# Altium PCB SparkIO Thermal Shield.PcbDoc
Units mil, origin at the board's own origin, x right, y up, seen from the top; angles counter-clockwise.
Board outline 2299.45 x 3399.77 mil, 2 copper layers ([1] Top Layer, [2] Bottom Layer), stack 61.2 mil thick; 47 components, 38 nets, 157 pads, 15 vias.
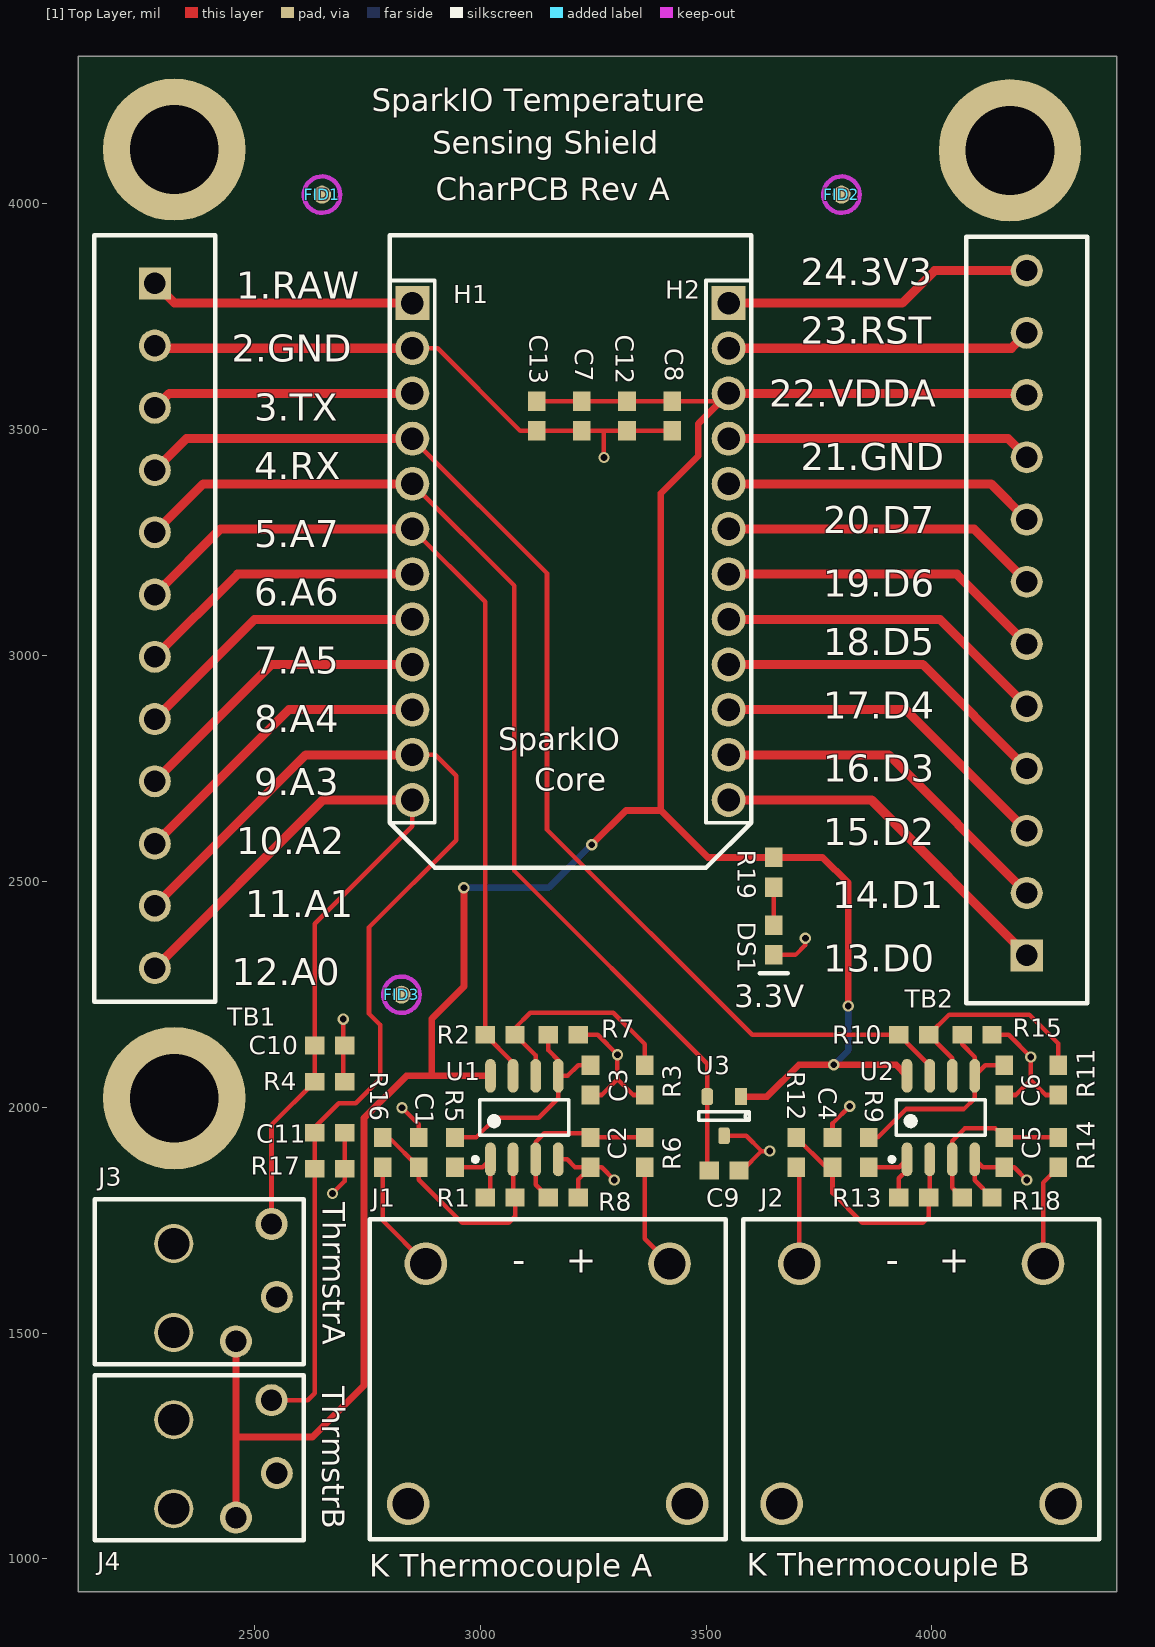
[diagram p0: [1] Top Layer view]
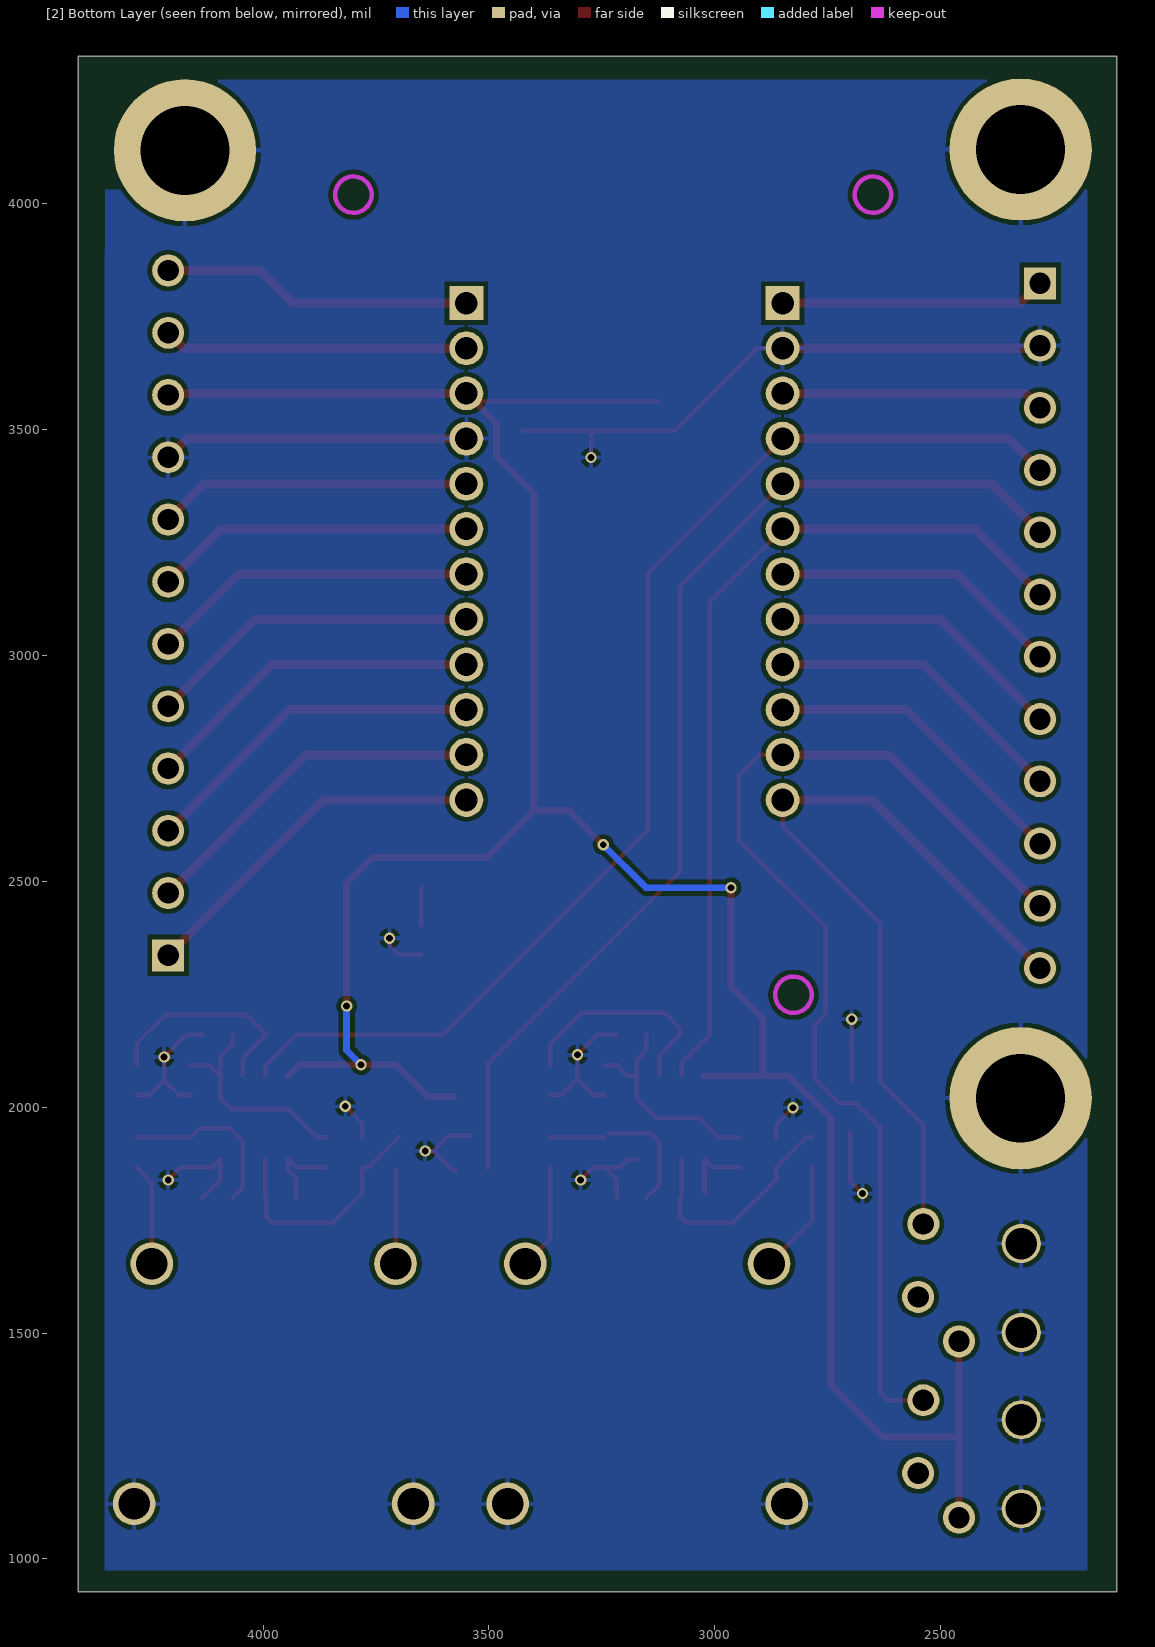
[diagram p1: [2] Bottom Layer view, seen from below]
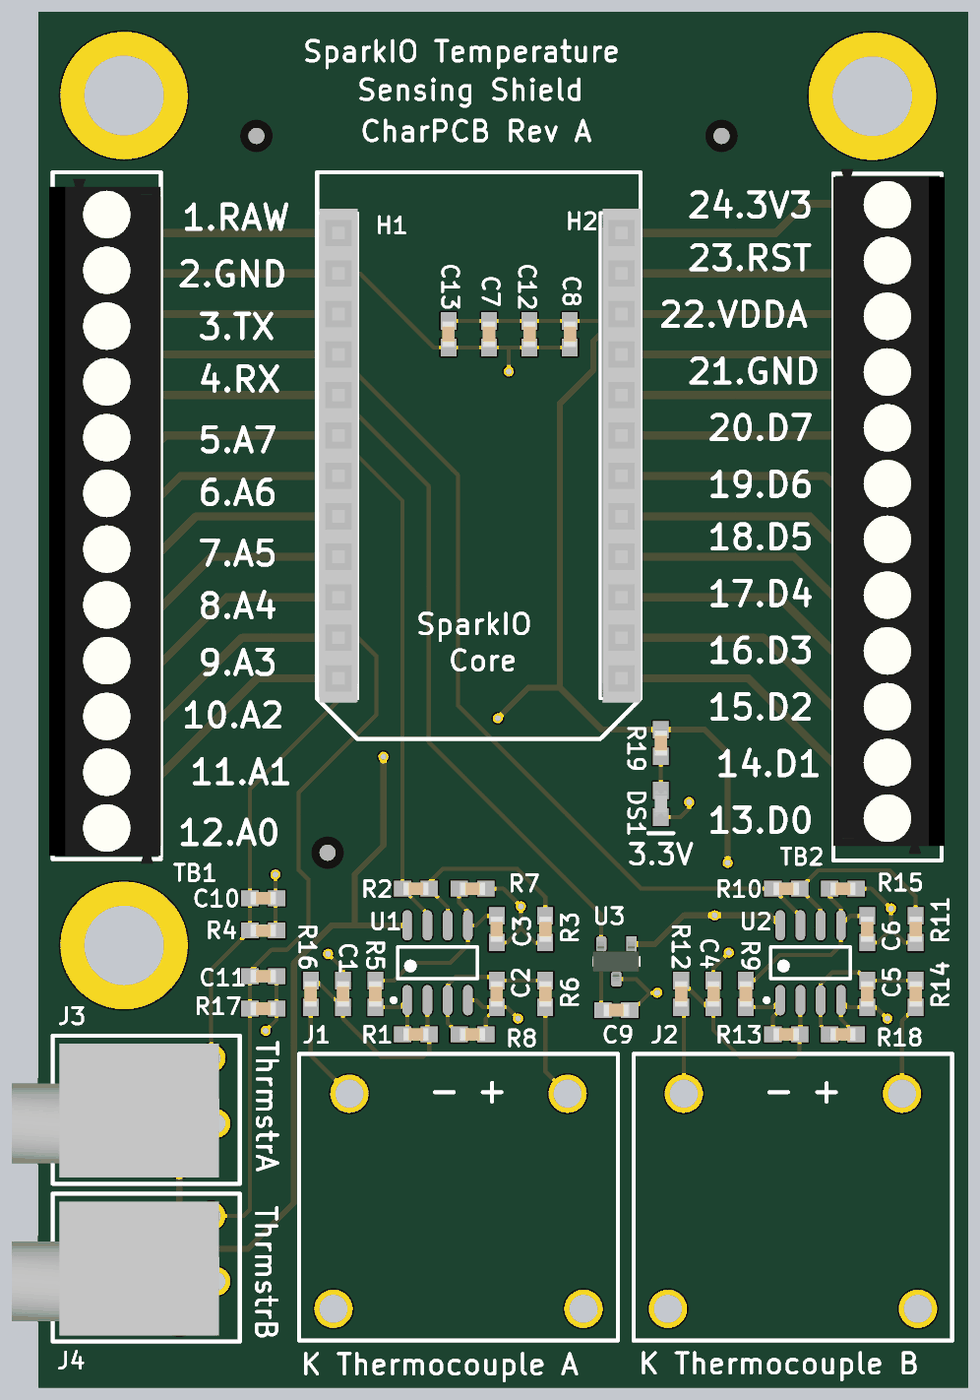
[diagram p2: 3D render of the assembled board from above, using the file's embedded part models]

## Layer stack, top to bottom
[1] Top Layer: signal copper 1.4
Dielectric: core 58.4, FR-4, Dk 4.8
[2] Bottom Layer: signal copper 1.4

## Board outline
2110,927 4409.45,927 4409.45,4326.77 2110,4326.77

## Design rules (kind name [scope] priority, off if disabled: settings)
Clearance [All] p1: gap=10
HoleSize [All] p1: absolutevalues=TRUE maxlimit=200 minlimit=1 maxpercent=80.000 minpercent=20.000
PlaneClearance PolyClearance [IsPoly] p1: clearance=50
PlaneClearance [All] p2: clearance=20
PolygonConnect [All] p1: connectstyle=Relief reliefconductorwidth=10 reliefentries=4 polygonreliefangle="90 Angle" airgapwidth=10
RoutingVias [All] p1: holewidth=28 width=50 viastyle="Through Hole" minholewidth=28 minwidth=50 maxholewidth=28 maxwidth=50
SolderMaskExpansion [All] p1: expansion=4
Width [All] p1: maxlimit=50 minlimit=10 preferedwidth=10
26 further rules are at their usual default settings.

## Components (designator, comment, footprint, x,y, rotation, side; value= is the part's Value field where it differs from the comment)
C1 "Capacitor" "0603 - NO SILK" 2864.25,1900 r270 top
C2 "Capacitor" "0603 - NO SILK" 3244.25,1900 r270 top
C3 "Capacitor" "0603 - NO SILK" 3244.25,2060 r270 top
C4 "Capacitor" "0603 - NO SILK" 3780,1900 r270 top
C5 "Capacitor" "0603 - NO SILK" 4160,1900 r270 top
C6 "Capacitor" "0603 - NO SILK" 4160,2060 r270 top
C7 "Capacitor" "0603 - NO SILK" 3225,3530 r270 top
C8 "Capacitor" "0603 - NO SILK" 3425,3530 r270 top
C9 "Capacitor" "0603 - NO SILK" 3540,1860 r0 top
C10 "Capacitor" "0603 - NO SILK" 2666.93,2136.67 r0 top
C11 "Capacitor" "0603 - NO SILK" 2666.93,1943.78 r0 top
C12 "Capacitor" "0603 - NO SILK" 3325,3530 r270 top
C13 "Capacitor" "0603 - NO SILK" 3125,3530 r270 top
DS1 "PowerInd" "LED0603 - Single" 3650,2370 r270 top
FID1 "Fiducial" Fiducial_40mil 2650,4020 r90 top
FID2 "Fiducial" Fiducial_40mil 3800,4020 r90 top
FID3 "Fiducial" Fiducial_40mil 2826,2249 r90 top
H1 "SparkIO Header 1" HDR1X12 2850,3780 r270 top
H2 "SparkIO Header 2" HDR1X12 3550,3780 r270 top
J1 "Thermocouple A" "PCC-SMP K Thermocouple" 3149.61,1653.54 r0 top
J2 "Thermocouple B" "PCC-SMP K Thermocouple" 3976.38,1653.54 r0 top
J3 "Thermistor A" "Audio Jack 2.5mm Mono" 2550,1580 r270 top
J4 "Thermistor B" "Audio Jack 2.5mm Mono" 2550,1190 r270 top
R1 "Resistor" "0603 - NO SILK" 3044.25,1800 r0 top
R2 "Resistor" "0603 - NO SILK" 3044.25,2160 r0 top
R3 "Resistor" "0603 - NO SILK" 3364.25,2060 r90 top
R4 "Resistor" "0603 - NO SILK" 2666.93,2056.67 r0 top
R5 "Resistor" "0603 - NO SILK" 2944.25,1900 r270 top
R6 "Resistor" "0603 - NO SILK" 3364.25,1900 r270 top
R7 "Resistor" "0603 - NO SILK" 3184.25,2160 r180 top
R8 "Resistor" "0603 - NO SILK" 3184.25,1800 r180 top
R9 "Resistor" "0603 - NO SILK" 3860,1900 r270 top
R10 "Resistor" "0603 - NO SILK" 3960,2160 r0 top
R11 "Resistor" "0603 - NO SILK" 4280,2060 r90 top
R12 "Resistor" "0603 - NO SILK" 3700,1900 r270 top
R13 "Resistor" "0603 - NO SILK" 3960,1800 r0 top
R14 "Resistor" "0603 - NO SILK" 4280,1900 r270 top
R15 "Resistor" "0603 - NO SILK" 4100,2160 r180 top
R16 "Resistor" "0603 - NO SILK" 2784.25,1900 r270 top
R17 "Resistor" "0603 - NO SILK" 2666.93,1863.78 r0 top
R18 "Resistor" "0603 - NO SILK" 4100,1800 r180 top
R19 "Resistor" "0603 - NO SILK" 3650,2520 r270 top
TB1 "SparkIO Terminal Block 1" "Terminal Block 3.5mm x 12" 2280,3930 r270 top
TB2 "SparkIO Terminal Block 2" "Terminal Block 3.5mm x 12" 4210,2230 r90 top
U1 "OPAMP dual" SOIC8 3097.79,1977.01 r90 top
U2 "OPAMP dual" SOIC8 4020,1977.01 r90 top
U3 "Header 3" SOT23-3L 3540,1980 r270 top

## Footprints (in the part's own frame and the unit in brackets; to place one, negate y for a bottom-side part, rotate by r counter-clockwise, add the part's x,y. Pads: shape width x height; smd on the part's side, far side on the other; paste and mask are expansions set on the pad)
"0603 - NO SILK" [mil] "Chip Resistor, 2-Leads, Body 1.6x0.8mm, IPC Medium Density"
  rect 43x39 smd: 1(-33,0) 2(33,0)
  body extent -31,-16 32,16, height 31
"Audio Jack 2.5mm Mono" [mm]
  round 2.2 hole 1.77: 0(-3,-5.8) 0(2,-5.8)
  round 1.8 hole 1.2: 1(2.5,-2.3) 2(0,0) 3(-4.1,-0.3)
  silkscreen extent -5.5,-10.25 3.78,1.5, body extent -5,-12.82 3.4,0.23, height 5
Fiducial_40mil [mil] "Fiducial 40mil"
  round 40 smd mask+20: 0(0,0)
  Keep-Out Layer circle w10: c0,0 r40.31
HDR1X12 [mil] "Connector; Header; 12 Position"
  rect 75x75 hole 50: 1(0,0)
  round 75 hole 50: 2(100,0) 3(200,0) 4(300,0) 5(400,0) 6(500,0) 7(600,0) 8(700,0) 9(800,0) 10(900,0) 11(1000,0) 12(1100,0)
  silkscreen extent -50,-50 1150,50, body extent -60,-45 1160,51, height 335
"LED0603 - Single" [mil] "Chip LED, 2-Leads, Body 1.6x0.8mm, IPC Medium Density"
  rect 43x39 smd: 1(-33,0) 2(33,0)
  body extent -32,-16 32,16, height 29
"PCC-SMP K Thermocouple" [mm] "K type thermocouple horizontal through hole connector"
  round 2.4 hole 1.77: 0(-7.85,-13.5) 0(7.85,-13.5) 1(-6.85,0) 2(6.85,0)
  silkscreen extent -10,-15.49 10,2.5, body extent -9.65,-15.24 9.65,2.03, height 6.3
SOIC8 [mm] "SOIC, 8-Leads, Body 4.9x3.9mm, Pitch 1.27mm, IPC High Density"
  oval 1.9x0.6 smd: 1(-2.35,1.905) 2(-2.35,0.635) 3(-2.35,-0.635) 4(-2.35,-1.905) 5(2.35,-1.905) 6(2.35,-0.635) 7(2.35,0.635) 8(2.35,1.905)
  silkscreen extent -2.47,-2.5 1,2.88, body extent -2,-2.5 2,2.5, height 1.75
SOT23-3L [mm]
  rect 0.95x0.65 smd: 1(-1.1,0.95)
  rrect50% 0.95x0.65 smd: 2(-1.1,-0.95) 3(1.1,0)
  silkscreen extent -0.25,-1.43 0.24,1.43, body extent -1.25,-1.49 1.23,1.43, height 1.01
"Terminal Block 3.5mm x 12" [mm]
  rect 1.8x1.8 hole 1.2: 1(2.7,0)
  round 1.8 hole 1.2: 2(6.2,0) 3(9.7,0) 4(13.2,0) 5(16.7,0) 6(20.2,0) 7(23.7,0) 8(27.2,0) 9(30.7,0) 10(34.2,0) 11(37.7,0) 12(41.2,0)
  silkscreen extent 0,-3.4 43.1,3.4, body extent 0.4,-3.6 43.39,3.4, height 8.4

## Part data
DS1: library part "LED Small", "LED small symbol"
FID1 FID2 FID3: library part Fiducial_1
H1 H2 TB1 TB2: library part "Header 12", "Header, 12-Pin"
J1 J2: library part "Header 2", "Header .1\" 2 Pos"
J3 J4: library part "Header 3", "Header .1\" 3 Pos"
U1 U2: "Dual Operational Amplifier"
U3: "Header .1\" 3 Pos"

## Free pads (board coordinates)
  round 314.96 hole 196.85: 0(2322.83,2019.84) 0(2322.83,4119.84) 0(4172.83,4118.11)

## Via types
v1: diameter 25, hole 15, [1] Top Layer to [2] Bottom Layer, 15 vias

## Nets (pads, with @x,y where several pads share a name; then routed paths per layer and width w, separated by ;. In a path a pad name is that pad's centre, name@x,y a point inside that pad or via, vN(x,y) a via of type N, cw(c..) or ccw(c..) an arc to the next point about the centre after c; other vN are vias at no path point)
GND: C1.1 C2.2 C3.2 C4.1 C5.2 C6.2 C7.2 C8.2 C9.2 C10.2 C11.2 C12.2 C13.2 DS1.2 H1.2 H2.4 J1.0 J2.0 J3.0 J4.0 pad.0 R3.1 R4.2 R7.1 R8.1 R11.1 R15.1 R17.2 R18.1 TB1.2 TB2.9 U1.4 U2.4 U3.3 | length 3774.7
  [1] Top Layer w10: v1(2673,1809) 2699.93,1835.93 R17.2 C11.2 ; R4.2@2697,2059.6 v1(2697,2195) ; v1(2827,1999) 2864.25,1961.75 C1.1 ; H1.2 2906,3680 3089,3497 C13.2 C7.2 C12.2 C8.2 ; U1.4 3192.51,1884.49 3210,1867 C2.2 ; R8.1 3217.25,1840 C2.2 ; R7.1 3260,2160 v1(3304,2116) 3304,2062 ; C3.2 3269,2027 3304,2062 ; v1(3274,3438) 3274,3496 ; v1(3297,1839) 3269,1867 C2.2 ; R3.1 3339,2027 3304,2062 ; H2.4@3533,3497 H2.4 ; U3.3 3589.31,1936.69 3623,1903 ; C9.2 3580,1860 3623,1903 ; v1(3641,1903) 3623,1903 ; DS1.2 3698,2337 3720,2359 v1(3720,2374) ; C4.1 3780,1964 v1(3818,2002) ; R18.1 4095,1838 U2.4 4112.49,1867 C5.2 4182,1867 v1(4210,1839) ; R15.1 4170,2160 v1(4219,2111) 4219,2060 ; C6.2 4186,2027 4219,2060 ; R11.1 4252,2027 4219,2060
  [1] Top Layer w20: TB1.2 2285.91,3680 H1.2 ; H2.4 4168.66,3480 TB2.9
NetDS1_1: DS1.1 R19.2 | length 84
  [1] Top Layer w10: DS1.1 R19.2
SC_1_RAW: H1.1 TB1.1 | length 588.1
  [1] Top Layer w20: TB1.1 2323.7,3780 H1.1
SC_3_TX: H1.3 TB1.3 | length 583.2
  [1] Top Layer w20: TB1.3 2311.89,3580 H1.3
SC_4_RX: H1.4 R10.1 TB1.4 U2.7 | length 2674
  [1] Top Layer w10: H1.4 3148,3182 3148,2614 3602,2160 R10.1 3995,2092 U2.7
  [1] Top Layer w20: TB1.4 2349.68,3480 H1.4
SC_5_A7: C9.1 H1.5 TB1.5 U3.2 | length 2400.4
  [1] Top Layer w10: H1.5 3076,3154 3076,2523 3502.6,2096.4 U3.2 C9.1@3502.6,1864.4
  [1] Top Layer w20: TB1.5 2387.48,3380 H1.5
SC_6_A6: H1.6 R2.1 TB1.6 U1.7 | length 1932.9
  [1] Top Layer w10: H1.6 3011.25,3118.75 R2.1 3072.79,2098.46 U1.7
  [1] Top Layer w20: TB1.6 2425.28,3280 H1.6
SC_7_A5: H1.7 TB1.7 | length 645.8
  [1] Top Layer w20: TB1.7 2463.07,3180 H1.7
SC_8_A4: H1.8 TB1.8 | length 661.5
  [1] Top Layer w20: TB1.8 2500.87,3080 H1.8
SC_9_A3: H1.9 TB1.9 | length 677.1
  [1] Top Layer w20: TB1.9 2538.66,2980 H1.9
SC_10_A2: H1.10 TB1.10 | length 692.8
  [1] Top Layer w20: TB1.10 2576.46,2880 H1.10
SC_11_A1: C11.1 H1.11 J4.3 R17.1 TB1.11 | length 2466.4
  [1] Top Layer w10: J4.3 2618.42,1351.42 2633.93,1366.93 R17.1 C11.1 2633.93,1955.93 2687,2009 2725,2009 2779,2063 2779,2182 2754,2207 2754,2398 2947,2591 2947,2734 2901,2780 H1.11
  [1] Top Layer w20: TB1.11 2614.25,2780 H1.11
SC_12_A0: C10.1 H1.12 J3.3 R4.1 TB1.12 | length 1791.8
  [1] Top Layer w10: J3.3 2538.19,1960.93 R4.1 C10.1 2633.93,2405.93 2850,2622 H1.12
  [1] Top Layer w20: TB1.12 2652.05,2680 H1.12
SC_13_D0/SDA1: H2.12 TB2.1 | length 802.4
  [1] Top Layer w20: H2.12 3866.3,2680 TB2.1
SC_14_D1/SCL1: H2.11 TB2.2 | length 786.7
  [1] Top Layer w20: H2.11 3904.09,2780 TB2.2
SC_15_D2: H2.10 TB2.3 | length 771.1
  [1] Top Layer w20: H2.10 3941.89,2880 TB2.3
SC_16_D3: H2.9 TB2.4 | length 755.4
  [1] Top Layer w20: H2.9 3979.68,2980 TB2.4
SC_17_D4: H2.8 TB2.5 | length 739.7
  [1] Top Layer w20: H2.8 4017.48,3080 TB2.5
SC_18_D5: H2.7 TB2.6 | length 724.1
  [1] Top Layer w20: H2.7 4055.28,3180 TB2.6
SC_19_D6: H2.6 TB2.7 | length 708.4
  [1] Top Layer w20: H2.6 4093.07,3280 TB2.7
SC_20_D7: H2.5 TB2.8 | length 692.8
  [1] Top Layer w20: H2.5 4130.87,3380 TB2.8
SC_22_VDDA: C7.1 C8.1 C12.1 C13.1 H2.3 J3.1 J4.1 R19.1 TB2.10 U1.8 U2.8 U3.1 | length 5963
  [1] Top Layer w10: C13.1 C7.1 C12.1 C8.1 3533,3563 H2.3
  [1] Top Layer w15: J4.1 J3.1 ; 2459.45,1270 2629,1270 2743,1384 2743,1976 2836.53,2069.53 2893,2069.53 ; v1(2964,2486) 2964,2267 2893,2196 2893,2069.53 ; U1.8 2893,2069.53 ; v1(3247,2581) 3323,2657 3400,2657 ; H2.3 3483,3513 3483,3442 3400,3359 3400,2657 ; U3.1 3635.31,2023.31 3706,2094 v1(3783,2094) 3920.53,2094 U2.8 ; v1(3815,2224) 3815,2496 3758,2553 R19.1 3504,2553 3400,2657
  [1] Top Layer w20: H2.3 TB2.10@4206.46,3580
  [2] Bottom Layer w15: v1(2964,2486) 3152,2486 v1(3247,2581) ; v1(3783,2094) 3815,2126 v1(3815,2224) v1@3814,2223
SC_23_RST: H2.2 TB2.11 | length 674.2
  [1] Top Layer w20: H2.2 4175.75,3680 TB2.11
SC_24_VCC: H2.1 TB2.12 | length 689.8
  [1] Top Layer w20: H2.1 3934,3780 4006.05,3852.05 TB2.12
TC_A_IN_+: J1.2 R6.2 | length 236.3
  [1] Top Layer w10: R6.2 3364.25,1708.59 J1.2
TC_A_IN_-: J1.1 R16.2 | length 253.1
  [1] Top Layer w10: R16.2 2784.25,1749.21 J1.1
TC_B_IN_+: J2.2 R14.2 | length 227.5
  [1] Top Layer w10: J2.2 4246.06,1833.06 R14.2
TC_B_IN_-: J2.1 R12.2 | length 206.8
  [1] Top Layer w10: J2.1 R12.2@3706.69,1860.31
U1A+: C2.1 R6.1 R8.2 U1.3 | length 375
  [1] Top Layer w10: R8.2 3122.79,1828.46 U1.3 3122.79,1922.79 3142,1942 C2.1@3235.25,1942 ; C2.1 R6.1
U1A-: C1.2 R1.2 R16.1 U1.2 | length 514.9
  [1] Top Layer w10: R16.1 2798.25,1933 C1.2 2864.25,1839.75 2960,1744 3063,1744 3077.25,1758.25 R1.2 ; R1.2@3072.79,1804.46 U1.2
U1AO: R1.1 R5.2 U1.1 | length 158.7
  [1] Top Layer w10: R5.2 3005.3,1867 U1.1 R1.1@3022.79,1811.55
U1B+: C3.1 R5.1 R7.2 U1.5 | length 494.8
  [1] Top Layer w10: R5.1 2991,1933 3035,1977 3130,1977 3172.79,2019.79 U1.5 ; R7.2 3151.25,2125.75 3172.79,2104.21 U1.5 ; C3.1 3217,2093 3193.53,2069.53 U1.5
U1B-: R2.2 R3.2 U1.6 | length 501
  [1] Top Layer w10: U1.6 3122.79,2114.46 R2.2 3077.25,2175.25 3111,2209 3295,2209 3364.25,2139.75 R3.2
U2A+: C5.1 R14.1 R18.2 U2.3 | length 389
  [1] Top Layer w10: R18.2 4045,1822 U2.3 4045,1925 4073,1953 4140,1953 C5.1 R14.1
U2A-: C4.2 R12.1 R13.2 U2.2 | length 535.5
  [1] Top Layer w10: R12.1 3766,1867 C4.2 3780,1810 3846,1744 3980,1744 3993,1757 R13.2 ; R13.2@3995,1802 U2.2
U2AO: R9.2 R13.1 U2.1 | length 184.2
  [1] Top Layer w10: R9.2 3927.51,1867 U2.1 3945,1861 3927,1843 R13.1
U2B+: C6.1 R9.1 R15.2 U2.5 | length 497.4
  [1] Top Layer w10: R9.1 3880,1933 3943,1996 4071,1996 4095,2020 U2.5 ; R15.2 4067,2139 4095,2111 U2.5 ; C6.1 4118.47,2093 U2.5
U2B-: R10.2 R11.2 U2.6 | length 492.2
  [1] Top Layer w10: U2.6 4045,2108 R10.2 4038,2205 4216,2205 4280,2141 R11.2
pads on no net: FID1.0 FID2.0 FID3.0 J3.2 J4.2

## Polygon pours and split planes (outlines as drawn)
GND on [2] Bottom Layer "Gnd Poly" (solid, pour order 6): 2175,4275 4120,4274 4280.29,4031.48 4349.66,4030.87 4349,3899 4350,3900 4350,975 2175,975

## Other copper
[1] Top Layer:
  text "[1] Top Layer" at 4908,4615 h60
[2] Bottom Layer:
  text "[2] Bottom Layer" at 4908,4400 h60

## Silkscreen, mask and mechanical layers (free items; w line width, h text height)
Top Overlay:
  lines w10: 3619,2297 3681,2297 ; 2800,2630 2900,2530 3500,2530 3600,2630 3600,3930 2800,3930 2800,2630
  text "Top Overlay" at 4908,4835 h60
  text "SparkIO Temperature" at 2760,4205 h50
  text "Sensing Shield" at 2894,4110 h50
  text "CharPCB Rev A" at 2902,4008 h50
  text "24.3V3" at 3710,3820 h60
  text "1.RAW" at 2460,3790 h60
  text "23.RST" at 3710,3690 h60
  text "2.GND" at 2450,3650 h60
  text "22.VDDA" at 3640,3550 h60
  text "3.TX" at 2500,3520 h60
  text "21.GND" at 3710,3410 h60
  text "4.RX" at 2500,3390 h60
  text "20.D7" at 3760,3270 h60
  text "5.A7" at 2500,3240 h60
  text "19.D6" at 3760,3130 h60
  text "6.A6" at 2500,3110 h60
  text "18.D5" at 3760,3000 h60
  text "7.A5" at 2500,2960 h60
  text "17.D4" at 3760,2860 h60
  text "8.A4" at 2500,2830 h60
  text "SparkIO" at 3040,2790 h50
  text "16.D3" at 3760,2720 h60
  text "Core" at 3120,2700 h50
  text "9.A3" at 2500,2690 h60
  text "15.D2" at 3760,2580 h60
  text "10.A2" at 2460,2560 h60
  text "14.D1" at 3780,2440 h60
  text "11.A1" at 2480,2420 h60
  text "13.D0" at 3760,2300 h60
  text "12.A0" at 2450,2270 h60
  text "3.3V" at 3563,2221 h50
  text "ThrmstrA" at 2652,1790 h50 r270
  text "ThrmstrB" at 2650,1382 h50 r270
  text "K Thermocouple B" at 3590,963 h50
  text "K Thermocouple A" at 2755,961 h50
Top Paste:
  text "Top Paste" at 4908,4939 h60
Bottom Paste:
  text ".layer_Name" at 4841.31,4820.86 h60
Top Solder:
  text "Top Solder" at 4908,4716 h60
Bottom Solder:
  text "Bottom Solder" at 4908,4507 h60
Drill Guide:
  text "Drill Guide" at 4911,3791.61 h60
[M1] Board Outline:
  lines w3.94: 4849.63,5084.27 4869.31,5084.27 ; 4852.63,3968.77 4872.31,3968.77 ; 4855.63,4343.17 4875.31,4343.17 ; 4889,5084.27 4908.69,5084.27 ; 4892,3968.77 4911.69,3968.77 ; 4895,4343.17 4914.69,4343.17 ; 4928.37,5084.27 4948.06,5084.27 ; 4931.37,3968.77 4951.06,3968.77 ; 4934.37,4343.17 4954.06,4343.17 ; 4967.74,5084.27 4987.43,5084.27 ; 4970.74,3968.77 4990.43,3968.77 ; 4973.74,4343.17 4993.43,4343.17 ; 5007.11,5084.27 5026.8,5084.27 ; 5010.11,3968.77 5029.8,3968.77 ; 5013.11,4343.17 5032.8,4343.17 ; 5046.48,5084.27 5066.17,5084.27 ; 5049.48,3968.77 5069.17,3968.77 ; 5052.48,4343.17 5072.17,4343.17 ; 5085.85,5084.27 5105.54,5084.27 ; 5088.85,3968.77 5108.54,3968.77 ; 5091.85,4343.17 5111.54,4343.17 ; 5125.22,5084.27 5144.91,5084.27 ; 5128.22,3968.77 5147.91,3968.77 ; 5131.22,4343.17 5150.91,4343.17 ; 5164.59,5084.27 5184.28,5084.27 ; 5167.59,3968.77 5187.28,3968.77 ; 5170.59,4343.17 5190.28,4343.17 ; 5203.96,5084.27 5223.65,5084.27 ; 5206.96,3968.77 5226.65,3968.77 ; 5209.96,4343.17 5229.65,4343.17 ; 5243.33,5084.27 5263.02,5084.27 ; 5246.33,3968.77 5266.02,3968.77 ; 5249.33,4343.17 5269.02,4343.17 ; 5282.7,5084.27 5302.39,5084.27 ; 5285.7,3968.77 5305.39,3968.77 ; 5288.7,4343.17 5308.39,4343.17 ; 5322.07,5084.27 5341.76,5084.27 ; 5325.07,3968.77 5344.76,3968.77 ; 5328.07,4343.17 5347.76,4343.17 ; 5361.44,5084.27 5381.13,5084.27 ; 5364.44,3968.77 5384.13,3968.77 ; 5367.44,4343.17 5387.13,4343.17 ; 5400.81,5084.27 5420.5,5084.27 ; 5403.81,3968.77 5423.5,3968.77 ; 5406.81,4343.17 5426.5,4343.17 ; 5440.18,5084.27 5459.87,5084.27 ; 5443.18,3968.77 5462.87,3968.77 ; 5446.18,4343.17 5465.87,4343.17 ; 5479.55,5084.27 5499.24,5084.27 ; 5482.55,3968.77 5502.24,3968.77 ; 5485.55,4343.17 5505.24,4343.17 ; 5518.92,5084.27 5538.61,5084.27 ; 5521.92,3968.77 5541.61,3968.77 ; 5524.92,4343.17 5544.61,4343.17 ; 5558.29,5084.27 5577.98,5084.27 ; 5561.29,3968.77 5580.98,3968.77 ; 5564.29,4343.17 5583.98,4343.17 ; 5597.66,5084.27 5617.35,5084.27 ; 5600.66,3968.77 5620.35,3968.77 ; 5603.66,4343.17 5623.35,4343.17 ; 5637.03,5084.27 5656.72,5084.27 ; 5640.03,3968.77 5659.72,3968.77 ; 5643.03,4343.17 5662.72,4343.17 ; 5676.4,5084.27 5696.09,5084.27 ; 5679.4,3968.77 5699.09,3968.77 ; 5682.4,4343.17 5702.09,4343.17 ; 5715.77,5084.27 5735.46,5084.27 ; 5718.77,3968.77 5738.46,3968.77 ; 5721.77,4343.17 5741.46,4343.17 ; 5755.14,5084.27 5774.83,5084.27 ; 5758.14,3968.77 5777.83,3968.77 ; 5761.14,4343.17 5780.83,4343.17 ; 5794.51,5084.27 5814.2,5084.27 ; 5797.51,3968.77 5817.2,3968.77 ; 5800.51,4343.17 5820.2,4343.17 ; 5833.88,5084.27 5853.57,5084.27 ; 5836.88,3968.77 5856.57,3968.77 ; 5839.88,4343.17 5859.57,4343.17 ; 5873.25,5084.27 5892.94,5084.27 ; 5876.25,3968.77 5895.94,3968.77 ; 5879.25,4343.17 5898.94,4343.17 ; 5912.62,5084.27 5932.31,5084.27 ; 5915.62,3968.77 5935.31,3968.77 ; 5918.62,4343.17 5938.31,4343.17 ; 5951.99,5084.27 5971.68,5084.27 ; 5954.99,3968.77 5974.68,3968.77 ; 5957.99,4343.17 5977.68,4343.17 ; 5991.36,5084.27 6011.05,5084.27 ; 5994.36,3968.77 6014.05,3968.77 ; 5997.36,4343.17 6017.05,4343.17 ; 6030.73,5084.27 6050.42,5084.27 ; 6033.73,3968.77 6053.42,3968.77 ; 6036.73,4343.17 6056.42,4343.17 ; 6070.1,5084.27 6089.79,5084.27 ; 6073.1,3968.77 6092.79,3968.77 ; 6076.1,4343.17 6095.79,4343.17 ; 6109.47,5084.27 6129.16,5084.27 ; 6112.47,3968.77 6132.16,3968.77 ; 6115.47,4343.17 6135.16,4343.17 ; 6148.84,5084.27 6168.53,5084.27 ; 6151.84,3968.77 6171.53,3968.77 ; 6154.84,4343.17 6174.53,4343.17 ; 6188.21,5084.27 6207.9,5084.27 ; 6191.21,3968.77 6210.9,3968.77 ; 6194.21,4343.17 6213.9,4343.17 ; 6227.58,5084.27 6247.27,5084.27 ; 6230.58,3968.77 6250.27,3968.77 ; 6233.58,4343.17 6253.27,4343.17 ; 6266.95,5084.27 6286.64,5084.27 ; 6269.95,3968.77 6289.64,3968.77 ; 6272.95,4343.17 6292.64,4343.17 ; 6306.32,5084.27 6326.01,5084.27 ; 6309.32,3968.77 6329.01,3968.77 ; 6312.32,4343.17 6332.01,4343.17 ; 6345.69,5084.27 6365.38,5084.27 ; 6348.69,3968.77 6368.38,3968.77 ; 6351.69,4343.17 6371.38,4343.17 ; 6385.06,5084.27 6404.75,5084.27 ; 6388.06,3968.77 6407.75,3968.77 ; 6391.06,4343.17 6410.75,4343.17 ; 6424.43,5084.27 6444.12,5084.27 ; 6427.43,3968.77 6447.12,3968.77 ; 6430.43,4343.17 6450.12,4343.17 ; 6463.8,5084.27 6483.49,5084.27 ; 6466.8,3968.77 6486.49,3968.77 ; 6469.8,4343.17 6489.49,4343.17 ; 6503.17,5084.27 6522.86,5084.27 ; 6506.17,3968.77 6525.86,3968.77 ; 6509.17,4343.17 6528.86,4343.17 ; 6542.54,5084.27 6562.23,5084.27 ; 6545.54,3968.77 6565.23,3968.77 ; 6548.54,4343.17 6568.23,4343.17 ; 4849.63,3750 4849.63,5074.43 4849.63,5192.54 6581.91,5192.54 6581.91,5074.43 6581.91,3750 4849.63,3750 ; 4854.63,5287.5 7116,5287.5 7116,5947 4854.63,5947 4854.63,5287.5
  lines w10: 4410,927 2110,927 2110,4327 4410,4327 4410,932
  text "Project:" at 4975.64,5799.31 h70
  text "SparkIO Thermal Shield" at 5563.29,5799.31 h70
  text "Revision:" at 4917.33,5681.2 h70
  text "A" at 5563.29,5681.2 h70
  text "Drawn By:" at 4894,5563.09 h70
  text "Jim Griszbacher" at 5563.29,5563.09 h70
  text "Date:" at 5185.57,5444.98 h70
  text ".print_date" at 5563.29,5444.98 h70
  text "Time:" at 5185.57,5326.87 h70
  text ".print_Time" at 5563.29,5326.87 h70
  text "Visible Layer(s)" at 4908,5113.8 h60
  text "[M1] Board Outline" at 4914,4228 h60
[M13] Component 3D Body:
  text "[M13] Component 3D Body" at 4914,4122 h60
[M15] Top Component Keepout:
  text "[M15] Top Component Keepout" at 4914,4006 h60
Drill Drawing:
  lines w1: 4886.44,1391 4936.44,1391 4911.44,1341 4886.44,1391 ; 4886.44,1503.5 4898.94,1503.5 4911.44,1491 4923.94,1503.5 4936.44,1503.5 4923.94,1516 4936.44,1528.5 4923.94,1528.5 4911.44,1541 4898.94,1528.5 4886.44,1528.5 4898.94,1516 4886.44,1503.5 ; 4886.44,1641 4911.44,1653.5 4936.44,1641 4923.94,1666 4936.44,1691 4911.44,1678.5 4886.44,1691 4898.94,1666 4886.44,1641 ; 4886.44,1803.5 4898.94,1803.5 4898.94,1791 4923.94,1791 4923.94,1803.5 4936.44,1803.5 4936.44,1828.5 4923.94,1828.5 4923.94,1841 4898.94,1841 4898.94,1828.5 4886.44,1828.5 4886.44,1803.5 ; 4886.44,1941 4886.44,1953.5 4898.94,1966 4886.44,1978.5 4886.44,1991 4898.94,1991 4911.44,1978.5 4923.94,1991 4936.44,1991 4936.44,1978.5 4923.94,1966 4936.44,1953.5 4936.44,1941 4923.94,1941 4911.44,1953.5 4898.94,1941 4886.44,1941
  lines w3.94: 4859,3579 5496,3579 ; 4863,2758 5290,2757
  lines w5: 2140,5267.83 3969,5269 ; 2140,5354.83 3967,5354
  lines w10: 2097,5585 2097,4860 2097,4858 3973,4858 3973,5584 3971,5586 2097,5586
  lines w15: 4818.31,1296 8697.28,1296 ; 4818.31,2046 8697.28,2046 ; 5369.19,1146 5369.19,2196 ; 6067,1146 6067,2196 ; 7412.6,1146 7412.6,2196 ; 7918.48,1146 7918.48,2196 ; 4818.31,1146 8697.28,1146 8697.28,2196 4818.31,2196 4818.31,1146
  text "Layer Stack Up Detail:" at 2140,5484.72 h44
  text "Final PCB Thickness is 62.0mil" at 2140,5399 h50
  text "Layer" at 2140,5322.33 h20
  text "Gerber" at 2678.18,5322.33 h20
  text "Dielectric" at 3242.83,5322.33 h20
  text "Copper Thickness" at 2877,5320 h20
  text "Material" at 3637,5304 h20
  text "(Final Weight)" at 2913,5283 h20
  text "Name" at 2140,5282.33 h20
  text "Document" at 2678.18,5282.33 h20
  text "Height" at 3242.83,5282.33 h20
  text "Top Solder Mask" at 2140,5186.67 h28
  text "(.GTS)" at 2678.18,5186.67 h28
  text "0.5mil" at 3242.83,5186.67 h28
  text "PSR 4000 Taiyo" at 3555.49,5186.67 h28
  text "1.4mil (1oz)" at 2887,5121 h28
  text "Top Layer" at 2143,5120.33 h28
  text "(.GTL)" at 2681.18,5120.33 h28
  text "58.2mil" at 3245.83,5041.67 h28
  text "Lam, 370HR" at 3558.49,5041.67 h28
  text "- - - - - - - - - - -" at 2148,5031 h50
  text "1.4mil (1oz)" at 2888,4969 h28
  text "Bottom Layer" at 2143,4963 h28
  text "(.GBL)" at 2681.18,4963 h28
  text "Bottom Solder Mask" at 2141,4888.67 h28
  text "(.GBS)" at 2679.18,4888.67 h28
  text "0.5mil" at 3243.83,4888.67 h28
  text "PSR 4000 Taiyo" at 3556.49,4888.67 h28
  text "Drill Drawing" at 4911,3890.03 h60
  text "Fabrication" at 4860.24,3596.76 h47.24
  text "i. Green Solder Mask SMOBC, in accordance to IPC-SM-840" at 4860.24,3518.02 h47.24
  text "ii. White Silkscreen on Top Side: No ink shall be on exposed pads" at 4860.24,3439.28 h47.24
  text "iii. ENIG Surface Finish" at 4860.24,3360.54 h47.24
  text "iv. PCB shall be RoHS material and RoHS process compliant," at 4860.37,3276.32 h47.24
  text "T(g) > 130C, T(d)-288 test >5 minutes" at 4863.37,3191.32 h47.24
  text "v. PCB is 10mil min trace/space design" at 4866.37,3096.57 h47.24
  text "vi. Drill sizes are finished size after plating" at 4865,3017 h47.24
  text "vii. PCB core is 58.2mil thick 370HR material or equivalent" at 4869,2928 h47.24
  text "Assembly" at 4868,2785 h47.24
  text "i. RoHS Clean process, in accordance to IPC-A-600 and IPC-A-610 Class II" at 4863.24,2695.53 h47.24
  text "ii. Top Side contains through-hole and surface-mount components" at 4863.24,2616.79 h47.24
  text "iii. Bottom Side contains no components, design is single sided" at 4863.24,2538.05 h47.24
  text "iv. Only populate the components marked as 'Fitted' in the Bill of Materials" at 4863.24,2459.31 h47.24
  text "v. No electrical testing required" at 4863.37,2375.08 h47.24
  text "Symbol" at 4908.31,2091 h72
  text "Hit Count" at 5414.19,2091 h72
  text "Finished Hole Size" at 6112,2091 h72
  text "Plated" at 7457.6,2091 h72
  text "Hole Type" at 7963.48,2091 h72
  text "3" at 5414.19,1941 h60
  text "196.85mil (5.000mm)" at 6112,1941 h60
  text "PTH" at 7457.6,1941 h60
  text "Round" at 7963.48,1941 h60
  text "12" at 5414.19,1791 h60
  text "69.69mil (1.770mm)" at 6112,1791 h60
  text "PTH" at 7457.6,1791 h60
  text "Round" at 7963.48,1791 h60
  text "24" at 5414.19,1641 h60
  text "50.00mil (1.270mm)" at 6112,1641 h60
  text "PTH" at 7457.6,1641 h60
  text "Round" at 7963.48,1641 h60
  text "30" at 5414.19,1491 h60
  text "47.24mil (1.200mm)" at 6112,1491 h60
  text "PTH" at 7457.6,1491 h60
  text "Round" at 7963.48,1491 h60
  text "15" at 5414.19,1341 h60
  text "15.00mil (0.381mm)" at 6112,1341 h60
  text "PTH" at 7457.6,1341 h60
  text "Round" at 7963.48,1341 h60
  text "84 Total" at 5414.19,1191 h60

## Dimensions
2322.83,4119.84 to 4172.83,4118.11 on Drill Drawing
2322.83,4119.84 to 2322.83,2019.84 on Drill Drawing
4410,4327 to 4410,927 on Drill Drawing
2110,4327 to 4410,4327 on Drill Drawing

## Text inside footprints (layer, text, board x,y; h text height)
J1: Top Overlay "-" at 3070.87,1633.86 h60; Top Overlay "+" at 3188.98,1633.86 h60
J2: Top Overlay "-" at 3897.64,1633.86 h60; Top Overlay "+" at 4015.75,1633.86 h60